# Allegro board demoa2.brd
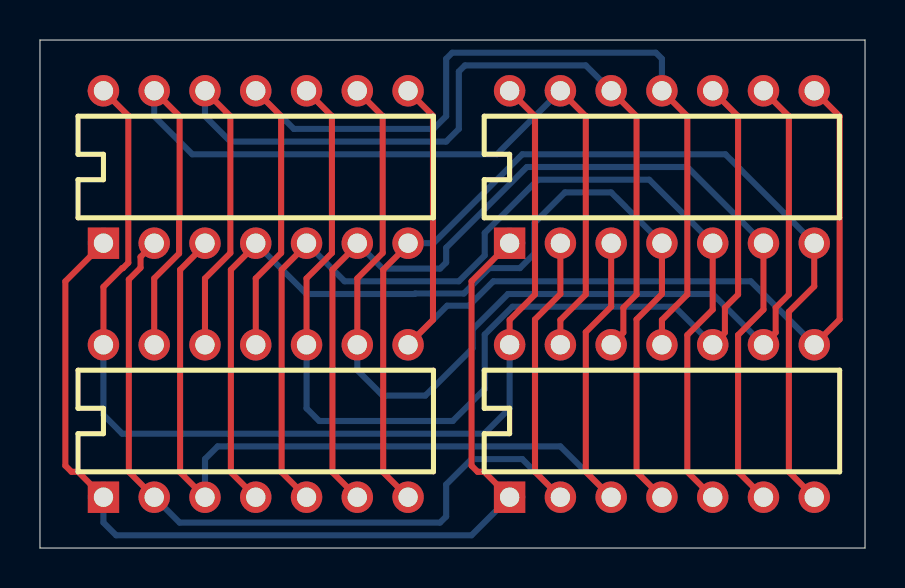
[diagram p0: board, top side]
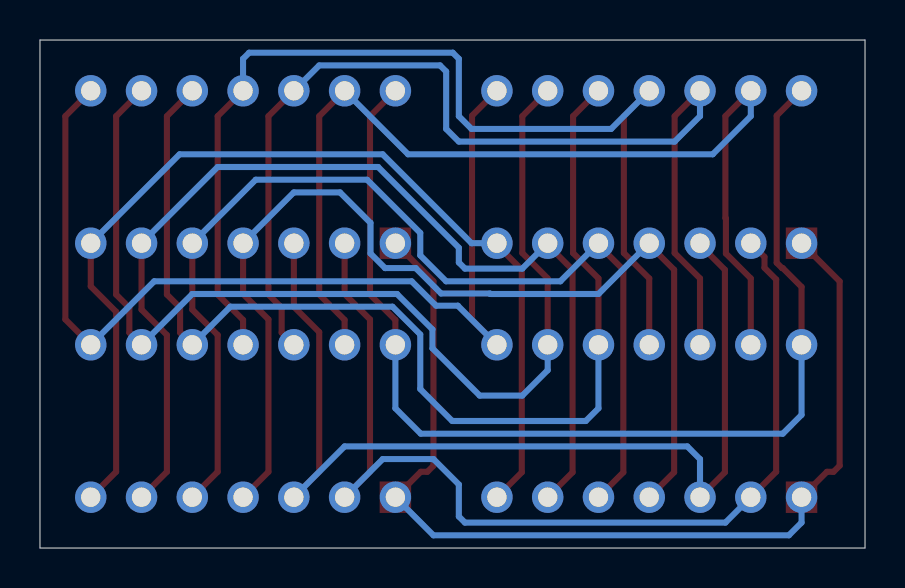
[diagram p1: board, bottom side, seen from below]

Outline 41.27 x 25.4 mm; copper layers: TOP, GND, POWER, INNER1, INNER2, BOTTOM. Coordinates in mm from the lower left corner of the outline.
Outline path: 3.18,22.87 3.01,22.87 ; 0,25.4 0,0 41.27,0 41.27,25.4 0,25.4

## Design rules (mm)
nets with their own width: min track width 0.305; nets DAT1 DAT2 DAT3 DAT4 DAT5 DAT6 DAT7 DAT8 DAT9 DAT10 DAT11 DAT12 GND VCC

## Placement (name value [footprint] x y rotation side)
U1  7400  [DIP14]  3.17 15.24 0 top
U2  7400  [DIP14]  23.5 15.24 0 top
U3  7400  [DIP14]  3.17 2.54 0 top
U4  7400  [DIP14]  23.5 2.54 0 top

## Library data of the parts
U1-U4 = 7400

## Footprints (pads in the part's own frame, mm; a bottom-side part is the same pattern mirrored in y, then rotated)
DIP14
  rect 1.575x1.575 hole 0.965: 1(0,0)
  round 1.575 hole 0.965: 2(2.54,0) 3(5.08,0) 4(7.62,0) 5(10.16,0) 6(12.7,0) 7(15.24,0) 8(15.24,7.62) 9(12.7,7.62) 10(10.16,7.62) 11(7.62,7.62) 12(5.08,7.62) 13(2.54,7.62) 14(0,7.62)

## Nets
GND: U1.7(TP-7) U2.7(TP-7) U3.7(TP-7) U4.7(TP-7)
VCC: U1.14(TP-14) U2.14(TP-14) U3.14(TP-14) U4.14(TP-14)
DAT1: U1.2(TP-2) U2.2(TP-2) U3.2(TP-2) U4.2(TP-2)
DAT2: U1.1(TP-1) U2.1(TP-1) U3.1(TP-1) U4.1(TP-1)
DAT3: U1.3(TP-3) U2.3(TP-3) U3.3(TP-3) U4.3(TP-3)
DAT4: U1.5(TP-5) U2.5(TP-5) U3.5(TP-5) U4.5(TP-5)
DAT5: U1.4(TP-4) U2.4(TP-4) U3.4(TP-4) U4.4(TP-4)
DAT6: U1.6(TP-6) U2.6(TP-6) U3.6(TP-6) U4.6(TP-6)
DAT7: U1.10(TP-10) U2.10(TP-10) U3.10(TP-10) U4.10(TP-10)
DAT8: U1.9(TP-9) U2.9(TP-9) U3.9(TP-9) U4.9(TP-9)
DAT9: U1.8(TP-8) U2.8(TP-8) U3.8(TP-8) U4.8(TP-8)
DAT10: U1.13(TP-13) U2.13(TP-13) U3.13(TP-13) U4.13(TP-13)
DAT11: U1.12(TP-12) U2.12(TP-12) U3.12(TP-12) U4.12(TP-12)
DAT12: U1.11(TP-11) U2.11(TP-11) U3.11(TP-11) U4.11(TP-11)

## Routing (per net, layer and track width the routed paths; a pad name or vN(x,y) marks a point on that pad's centre or on a via; arc(x,y) is an arc through that point)
GND: length 51.5
  TOP w0.305: U2.7 38.73,13.08 37.46,11.81 37.46,3.81 U4.7 ; U3.7 17.17,3.78 17.17,13.91 18.42,15.16 U1.7
  BOTTOM w0.305: U2.7 34.29,19.68 24.13,19.68 19.69,15.24 U1.7
VCC: length 56.1
  TOP w0.305: U2.14 24.77,21.59 24.77,12.67 23.5,11.4 U4.14 ; U3.14 3.17,13.06 4.11,14 4.15,14 4.42,14.26 4.42,21.62 U1.14 2.54,22.86
  BOTTOM w0.305: U3.14 3.17,6.65 4.11,5.71 22.23,5.71 23.5,6.99 U4.14
DAT1: length 51.4
  TOP w0.305: U4.2 24.77,3.81 24.77,11.43 26.04,12.7 U2.2 ; U3.2 4.45,3.81 4.45,13.43 5.03,14.01 5.03,14.55 U1.2
  BOTTOM w0.305: U3.2 6.98,1.27 20.02,1.27 20.32,1.57 20.32,3.17 21.59,4.45 24.13,4.45 U4.2
DAT2: length 51.6
  TOP w0.305: U1.1 1.27,13.34 1.27,4.11 1.57,3.81 1.91,3.81 U3.1 ; U4.1 22.23,3.81 21.89,3.81 21.59,4.11 21.59,13.34 U2.1
  BOTTOM w0.305: U3.1 3.17,1.27 3.81,0.64 21.59,0.64 U4.1
DAT3: length 51
  TOP w0.305: U4.3 27.31,3.81 27.31,10.79 28.58,12.06 U2.3 ; U1.3 8.26,15.16 7.01,13.91 7.01,3.78 U3.3
  BOTTOM w0.305: U3.3 8.26,4.45 8.89,5.08 26.04,5.08 U4.3
DAT4: length 52.7
  TOP w0.305: U3.5 12.09,3.78 12.09,13.91 13.33,15.16 U1.5 ; U2.5 33.66,11.92 32.38,10.65 32.38,3.81 U4.5
  BOTTOM w0.305: U1.5 15.24,13.34 20.96,13.34 22.25,14.63 22.25,15.76 24.91,18.41 30.48,18.41 U2.5
DAT5: length 52.9
  TOP w0.305: U2.4 31.12,12.7 29.85,11.43 29.85,3.81 U4.4 ; U3.4 9.55,3.78 9.55,13.91 10.79,15.16 U1.4
  BOTTOM w0.305: U1.4 13.33,12.7 18.75,12.7 18.77,12.73 21.21,12.73 22.48,14 24.01,14 24.74,14.72 24.74,16.26 26.26,17.78 28.58,17.78 U2.4
DAT6: length 52.4
  TOP w0.305: U1.6 15.88,15.16 14.63,13.91 14.63,3.78 U3.6 ; U4.6 34.92,3.81 34.92,10.65 36.2,11.92 U2.6
  BOTTOM w0.305: U2.6 32.38,19.05 24.36,19.05 20.32,15.01 20.32,14.27 20.02,13.97 17.15,13.97 U1.6
DAT7: length 56
  TOP w0.305: U1.10 14.61,21.59 14.61,14.75 13.33,13.48 U3.10 ; U2.10 34.92,21.59 34.92,12.67 34.26,12.01 34.26,10.77 U4.10
  BOTTOM w0.305: U4.10 31.75,12.06 23.64,12.06 22.25,10.68 22.25,7.95 20.65,6.35 13.97,6.35 13.33,6.99 U3.10
DAT8: length 53.3
  TOP w0.305: U1.9 17.15,21.59 17.15,14.75 15.88,13.48 U3.9 ; U2.9 37.46,21.59 37.46,12.67 36.8,12.01 36.8,10.77 U4.9
  BOTTOM w0.305: U3.9 15.88,8.89 17.15,7.62 19.28,7.62 21.64,9.98 21.64,10.93 23.41,12.7 33.66,12.7 U4.9
DAT9: length 50.4
  TOP w0.305: U1.8 19.66,21.62 19.66,11.4 U3.8 ; U2.8 40,21.59 40,11.43 U4.8
  BOTTOM w0.305: U3.8 20.37,12.12 21.46,12.12 22.68,13.34 35.56,13.34 U4.8
DAT10: length 51.2
  TOP w0.305: U3.13 5.71,13.48 6.96,14.72 6.96,16.47 6.98,16.5 6.98,21.59 U1.13 ; U2.13 27.31,21.59 27.31,12.67 26.04,11.4 U4.13
  BOTTOM w0.305: U2.13 22.86,19.68 7.62,19.68 5.71,21.59 U1.13
DAT11: length 53.4
  TOP w0.305: U1.12 9.53,21.59 9.53,14.75 8.26,13.48 U3.12 ; U2.12 29.85,21.59 29.85,12.67 29.18,12.01 29.18,10.77 U4.12
  BOTTOM w0.305: U2.12 27.31,24.13 21.26,24.13 20.96,23.83 20.96,20.95 20.32,20.32 9.53,20.32 8.26,21.59 U1.12
DAT12: length 53.6
  TOP w0.305: U2.11 32.38,21.59 32.38,12.67 31.12,11.4 U4.11 ; U1.11 12.06,21.59 12.06,14.75 10.79,13.48 U3.11
  BOTTOM w0.305: U1.11 12.7,20.95 19.69,20.95 20.32,21.59 20.32,24.46 20.62,24.77 30.81,24.77 31.12,24.46 U2.11
